# Altium PCB Приставка.PcbDoc
Units mm, origin at the board's own origin, x right, y up, seen from the top; angles counter-clockwise.
Board outline 63 x 34.5 mm, 2 copper layers (Top Layer, Bottom Layer), stack 0.325 mm thick; 36 components, 22 nets, 118 pads, 28 vias.
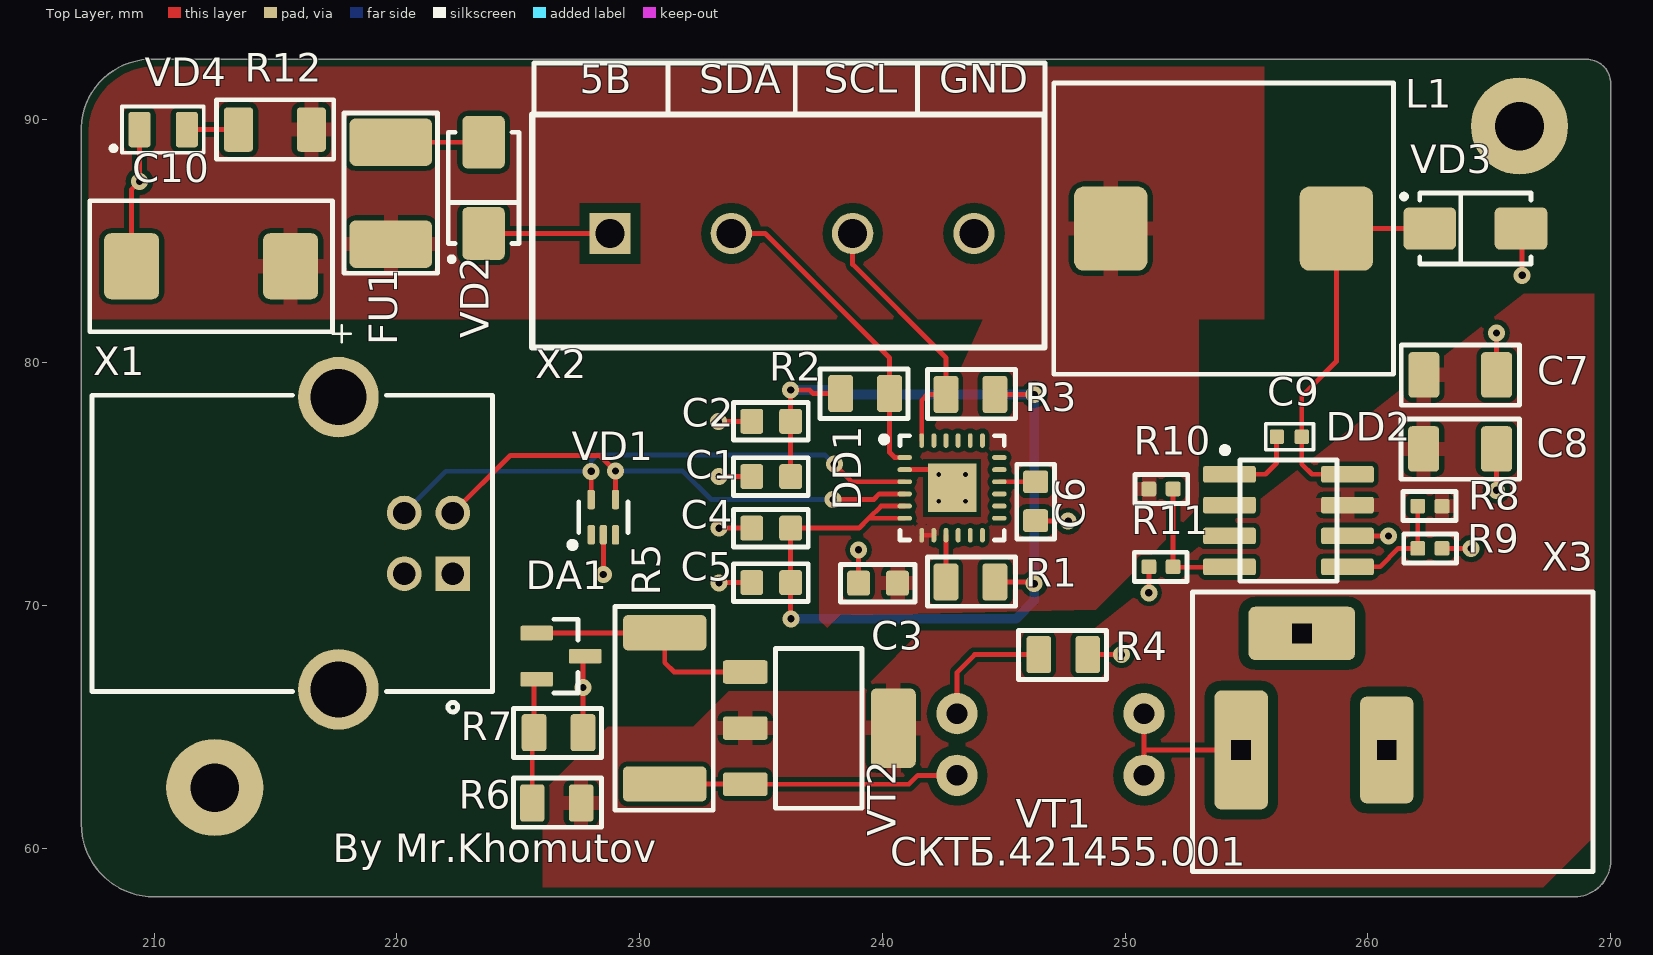
[diagram p0: Top Layer view]
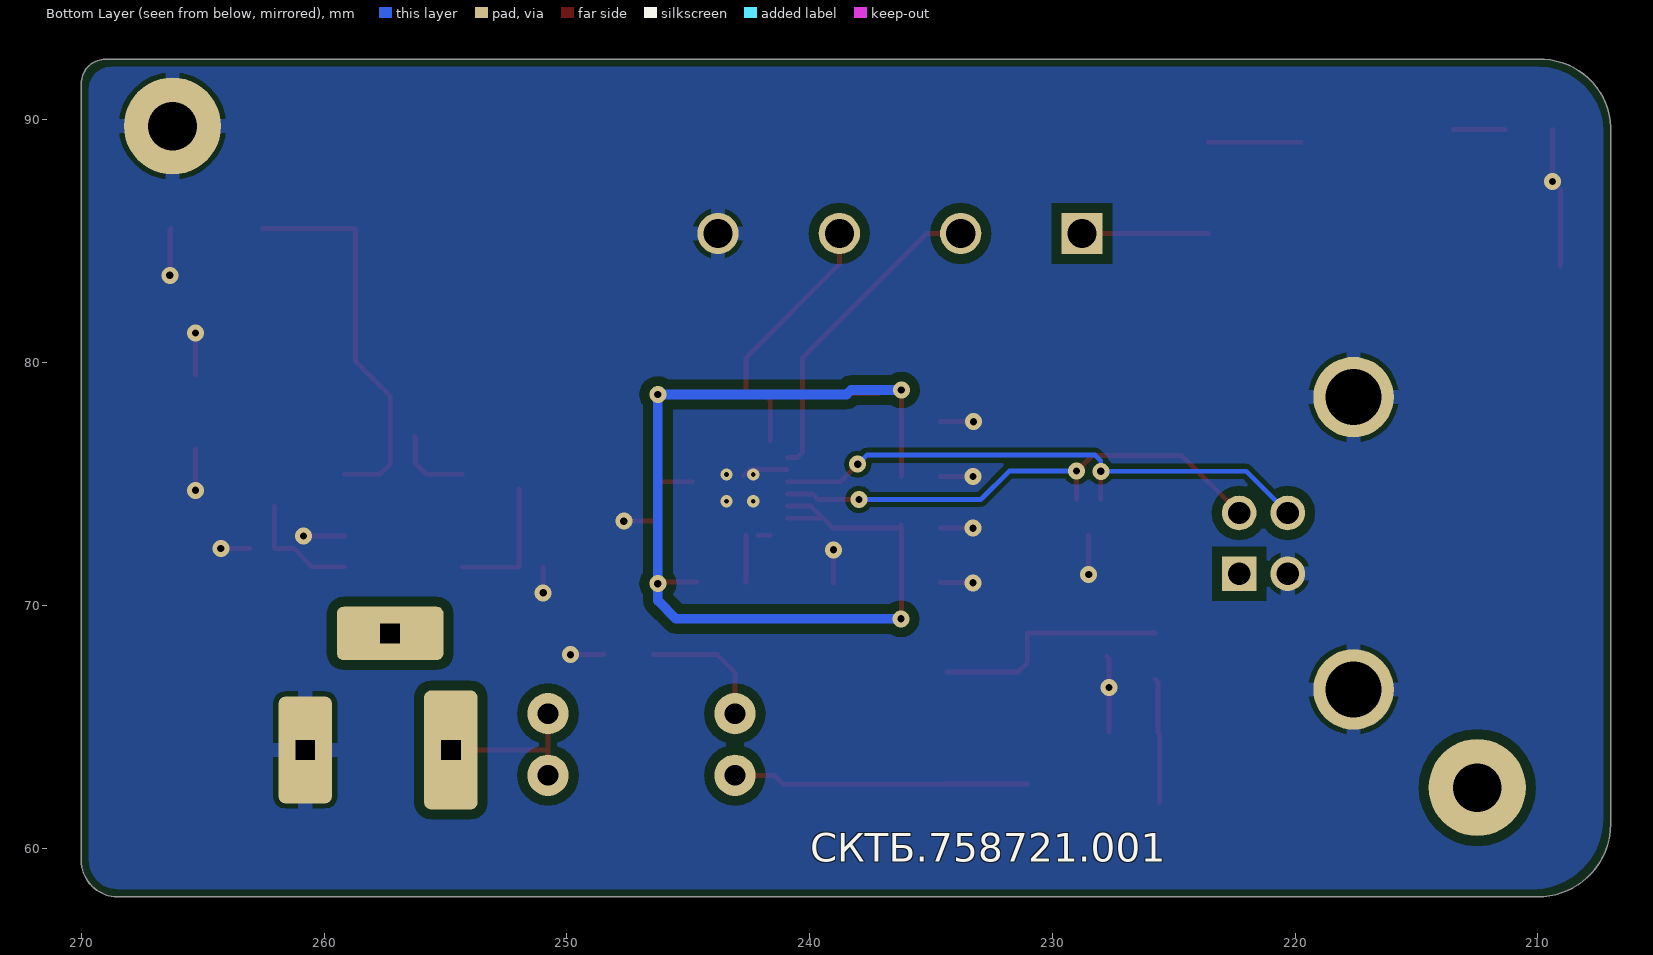
[diagram p1: Bottom Layer view, seen from below]
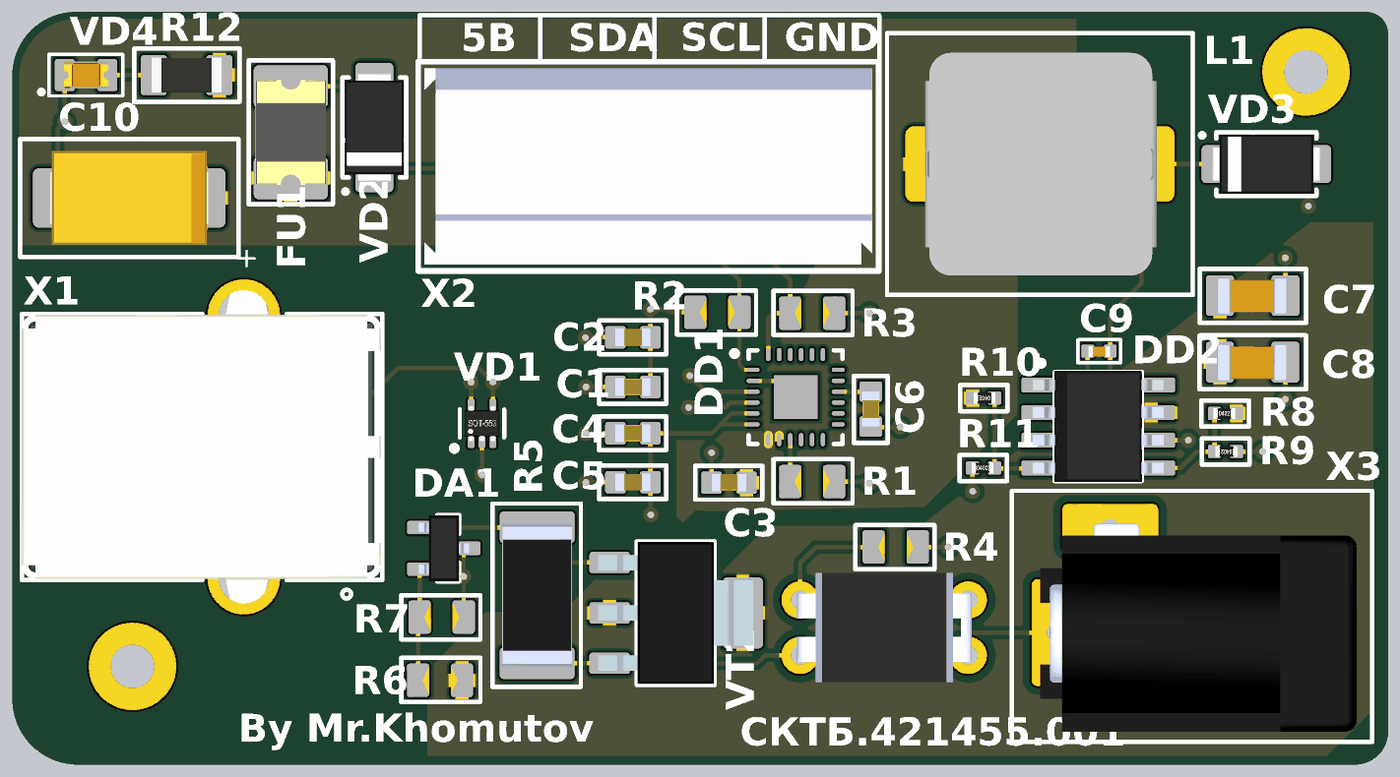
[diagram p2: 3D render of the assembled board from above, using the file's embedded part models]

## Layer stack, top to bottom
Top Solder: solder mask 0.0102, Solder Resist, Dk 3.5
Top Layer: signal copper 0.0356
Dielectric 1: core 0.254, FR-4, Dk 4.2
Bottom Layer: signal copper 0.0356
Bottom Solder: solder mask 0.0102, Solder Resist, Dk 3.5

## Board outline
207,61 207,89.7 cw(c209.9,89.6) 210,92.5 269,92.5 cw(c269,91.5) 270,91.5 270,59.504 cw(c268.498,59.502) 268.5,58 210,58 cw(c210,61)

## Design rules (kind name [scope] priority, off if disabled: settings)
Clearance Clearance_power [InNet('+5В_USB') vs InNet('GND')] p1: gap=0.4 ignorepadtopadclearanceinfootprint=FALSE
Clearance Clearance_power_1 [InNet('X2_VCC') vs InNet('GND')] p2: gap=0.4 ignorepadtopadclearanceinfootprint=FALSE
Clearance Clearance_power_VDD [InNet('NetVD2_1') vs InNet('GND')] p3: gap=0.4 ignorepadtopadclearanceinfootprint=FALSE
Clearance Clearance_power3.3 [InNet('+3,3В') vs InNet('GND')] p4: gap=0.4 ignorepadtopadclearanceinfootprint=FALSE
Clearance [All] p5: gap=0.2 ignorepadtopadclearanceinfootprint=FALSE except(0.1: SMDPad-SMDPad; 0.4: THPad-THPad THPad-Fill THPad-Poly THPad-Region; 0.6: Arc-THPad Track-THPad)
ComponentClearance [All] p1: gap=0.3 collisioncheckmode=3 verticalgap=0.01 showdistances=FALSE
HoleSize [All] p1: absolutevalues=TRUE maxlimit=5 minlimit=0.025 maxpercent=80.000 minpercent=20.000
MinimumSolderMaskSliver [All] p1: minsoldermaskwidth=0.05
PolygonConnect PolygonConnect_via [IsVia] p1: connectstyle=Direct reliefconductorwidth=0.254 reliefentries=4 polygonreliefangle="90 Angle" airgapwidth=0.254
PolygonConnect [All] p2: connectstyle=Relief reliefconductorwidth=0.6 reliefentries=4 polygonreliefangle="90 Angle" airgapwidth=0.2
RoutingVias [All] p1: holewidth=0.3 width=0.7 viastyle="Through Hole" minholewidth=0.3 minwidth=0.7 maxholewidth=0.3 maxwidth=0.7
SilkToSolderMaskClearance [IsPad] p1: minsilkscreentomaskgap=0 clearancetoexposedcopper=TRUE
SolderMaskExpansion [All] p1: expansion=0.102
Width [All] p1: maxlimit=3 minlimit=0.2 preferedwidth=0.2 minimp=50.000000 maximp=50.000000 favimp=50.000000
26 further rules are at their usual default settings.

## Classes and differential pairs
component class "Преобразователь напряжения": C7 C8 C9 C10 DA1 DD2 L1 R4 R5 R6 R7 R8 R9 R10 R11 R12 VD3 VD4 VT1 VT2 X3
component class "Преобразователь интерфейсов": 2 C1 C2 C3 C4 C5 C6 DD1 FU1 R1 R2 R3 VD1 VD2 X1 X2

## Components (designator, comment, footprint, x,y, rotation, side; value= is the part's Value field where it differs from the comment)
C1 "Capacitor" C0603 235.419,75.311 r0 top value=1мк
C2 "Capacitor" C0603 235.419,77.586 r0 top value=0,1мк
C3 "Capacitor" C0603 239.819,70.92 r0 top value=1мк
C4 "Capacitor" C0603 235.419,73.186 r0 top value=1мк
C5 "Capacitor" C0603 235.419,70.945 r0 top value=0,1мк
C6 "Capacitor" C0603 246.31,74.295 r90 top value=1мк
C7 "Capacitor" C1206 263.772,79.476 r180 top value=4,7мк
C8 "Capacitor" C1206 263.767,76.426 r180 top value=4,7мк
C9 "Capacitor" C0402 257.275,76.93 r180 top value=0,01мк
C10 "Capacitor_pol" "TANTAL CASE E" 212.35,83.975 r180 top value=100мк
DA1 "TL431" SOT23-3 226.759,67.914 r0 top
DD1 "CP2112-F02-GM" QFN24 242.869,74.845 r0 top
DD2 "TPS5420" SO8 256.725,73.5 r0 top
FU1 "Fuse" FUSE812 219.75,86.985 r270 top
L1 "Inductor" L4040 254.055,85.525 r180 top value=33мкГн
R1 "Resistor_0,125Вт" R0805 243.626,70.97 r0 top value=10к
R2 "Resistor_0,125Вт" R0805 239.285,78.735 r180 top value=10к
R3 "Resistor_0,125Вт" R0805 243.626,78.695 r0 top value=10к
R4 "Resistor_0,125Вт" R0805 247.45,67.975 r180 top value=10к
R5 "Resistor_1Вт" R2512 231.034,65.764 r90 top value=620
R6 "Resistor_0,125Вт" R0805 226.584,61.864 r0 top value=8,2к
R7 "Resistor_0,125Вт" R0805 226.659,64.764 r180 top value=1,5к
R8 "Resistor_0,062Вт" R0402 262.55,74.095 r0 top value=10к
R9 "Resistor_0,062Вт" R0402 262.55,72.35 r180 top value=560
R10 "Resistor_0,062Вт" R0402 251.475,74.8 r180 top value=10к
R11 "Resistor_0,062Вт" R0402 251.475,71.595 r0 top value=3,3к
R12 "Resistor_0,25Вт" R1206 214.977,89.605 r0 top value=180
VD1 "SP3003-02XTG" SOT553 228.505,73.638 r90 top
VD2 "DiodeSchottky" SMA 223.575,87.205 r90 top
VD3 "DiodeSchottky" SMA 264.425,85.525 r0 top
VD4 "LED" L_0805 210.375,89.605 r0 top
VT1 "P-MOSFET" HD-1 246.925,64.275 r180 top
VT2 "BJT NPN" SOT-223 237.375,64.95 r270 top
X1 "Вход USB Type B" "USB-B RECEPTACLE" 207.785,72.563 r270 top
X2 "I2C устройства" "TERMINAL 4 way-5mm" 236.275,85.325 r0 top
X3 "Вход питания 12В" DS-210 254.775,64.05 r180 top

## Footprints (in the part's own frame and the unit in brackets; to place one, negate y for a bottom-side part, rotate by r counter-clockwise, add the part's x,y. Pads: shape width x height; smd on the part's side, far side on the other; paste and mask are expansions set on the pad)
C0402 [mm]
  rrect25% 0.59x0.6 smd: 1(0,-0.02) 2(1.025,-0.02)
  silkscreen extent -0.48,-0.55 1.48,0.51, body extent 0.01,-0.25 1.01,0.25, height 0.48
C0603 [mm]
  rrect25% 0.94x1.03 smd: 1(-0.8,0) 2(0.8,0)
  silkscreen extent -1.55,-0.77 1.53,0.77, body extent -0.8,-0.4 0.8,0.4, height 0.9
C1206 [mm]
  rrect25% 1.28x1.87 smd: 1(-1.528,-0.024) 2(1.472,-0.024)
  silkscreen extent -2.47,-1.25 2.4,1.22, body extent -1.6,-0.85 1.6,0.85, height 1.75
DS-210 [mm] "Гнездо питания 2,1х5,5мм на панель"
  rrect25% 2.2x4.9 hole 0.8 square: 1(0,0)
  rrect25% 2.2x4.4 hole 0.8 square: 2(-6,0)
  rrect25% 4.4x2.2 hole 0.8 square: 3(-2.5,-4.8)
  silkscreen extent -14.5,-6.5 2,5, body extent -13.79,-5 0.71,4.55, height 11.5
FUSE812 [mm] "Самовосстанавливающийся предохранитель"
  rrect25% 1.95x3.4 smd: 1(-2.1,0) 2(2.1,0)
  silkscreen extent -3.3,-1.92 3.3,1.92, body extent -2.41,-1.61 2.41,1.61, height 1.32
HD-1 [mm]
  round 1.7 hole 0.85: 1(3.85,-1.27) 2(3.85,1.27) 3(-3.85,-1.27) 3(-3.85,1.27)
  body extent -4.01,-2.5 4.01,2.5, height 6.7
L4040 [mm]
  rrect25% 3.02x3.46 smd paste-5: 1(-4.645,0) 2(4.65,0)
  silkscreen extent -7,-6 7,6, body extent -5.35,-5.11 5.27,5.11, height 3.78
L_0805 [mm] "SMD LED LAMP"
  rrect25% 0.91x1.46 smd: 1(-0.975,0) 2(0.975,0)
  silkscreen extent -2.15,-0.95 1.68,0.95, body extent -1.01,-0.62 1.01,0.63, height 1.1
QFN24 [mm]
  oval 0.6x0.2 smd: 1(-1.95,1.25) 2(-1.95,0.75) 3(-1.95,0.25) 4(-1.95,-0.25) 5(-1.95,-0.75) 6(-1.95,-1.25) 13(1.95,-1.25) 14(1.95,-0.75) 15(1.95,-0.25) 16(1.95,0.25) 17(1.95,0.75) 18(1.95,1.25)
  oval 0.2x0.6 smd: 7(-1.25,-1.95) 8(-0.75,-1.95) 9(-0.25,-1.95) 10(0.25,-1.95) 11(0.75,-1.95) 12(1.25,-1.95) 19(1.25,1.95) 20(0.75,1.95) 21(0.25,1.95) 22(-0.25,1.95) 23(-0.75,1.95) 24(-1.25,1.95)
  rect 2x2 smd: 25(0,0)
  silkscreen extent -2.92,-2.15 2.15,2.15, body extent -2,-2 2,2, height 0.8
R0402 [mm]
  rrect25% 0.61x0.6 smd: 1(-0.5,0) 2(0.5,0)
  silkscreen extent -1.1,-0.6 1.07,0.6, body extent -0.55,-0.25 0.45,0.25, height 0.35
R0805 [mm] "Chip Resistor, 2-Leads, Body 2,10x1,30mm, IPC Medium Density"
  rrect25% 1.02x1.53 smd paste-5: 1(-1.008,0) 2(1.008,0)
  silkscreen extent -1.78,-1 1.85,1.02, body extent -1.1,-0.7 1.1,0.7, height 0.55
R1206 [mm]
  rrect25% 1.2x1.83 smd: 1(-1.5,0) 2(1.5,0)
  silkscreen extent -2.4,-1.22 2.42,1.22, body extent -1.6,-0.8 1.6,0.8, height 0.55
R2512 [mm]
  rrect25% 1.45x3.43 smd: 1(-3.115,0) 2(3.115,0)
  silkscreen extent -4.2,-2 4.2,2.05, body extent -3.35,-1.6 3.35,1.6, height 0.55
SMA [mm]
  rrect25% 2.17x1.74 smd: 1(-1.88,0) 2(1.88,0)
  silkscreen extent -3.04,-1.46 2.29,1.46, body extent -2.5,-1.35 2.5,1.35, height 2.15
SO8 [mm]
  rrect25% 2.17x0.68 smd: 1(-2.43,1.905) 2(-2.43,0.635) 3(-2.43,-0.635) 4(-2.43,-1.905) 5(2.43,-1.905) 6(2.43,-0.635) 7(2.43,0.635) 8(2.43,1.905)
  silkscreen extent -2.74,-2.5 2,3.02, body extent -3,-2.54 3,2.54, height 1.7
SOT23-3 [mm]
  rrect25% 1.35x0.61 smd: 1(-1,0.95) 2(-1,-0.95) 3(1,0)
  silkscreen extent -0.3,-1.52 0.7,1.52, body extent -1.15,-1.5 1.15,1.5, height 1.1
SOT553 [mm]
  rrect50% 0.8x0.305 smd: 1(-0.725,0.5) 2(-0.725,0) 3(-0.725,-0.5) 4(0.725,-0.5) 5(0.725,0.5)
  silkscreen extent -1.27,-1.02 0.64,1.39, body extent -0.8,-0.8 0.8,0.8, height 0.48
SOT-223 [mm]
  rrect25% 0.97x1.85 smd: 1(-2.311,-3.024) 2(0,-3.024) 3(2.311,-3.024)
  rrect25% 3.27x1.85 smd: 2(0,3.074)
  silkscreen extent -3.28,-1.78 3.3,1.78, body extent -3.25,-3.54 3.25,3.54, height 1.65
"TANTAL CASE E" [mm]
  rrect25% 2.27x2.72 smd: 1(-3.275,0) 2(3.275,0)
  silkscreen extent -5.75,-2.7 5,3.12, body extent -3.65,-2.15 3.65,2.15, height 4.5
"TERMINAL 4 way-5mm" [mm]
  rect 1.7x1.7 hole 1.2: 1(-7.5,0)
  round 1.7 hole 1.2: 2(-2.5,0) 3(2.5,0) 4(7.5,0)
  silkscreen extent -10.7,-4.7 10.4,4.9, body extent -10.4,-4.4 10.1,4.6, height 15.2
"USB-B RECEPTACLE" [mm]
  rect 1.428x1.428 hole 0.92: 1(1.25,14.52)
  round 1.428 hole 0.92: 2(-1.25,14.52) 3(-1.25,12.52) 4(1.25,12.52)
  round 3.316 hole 2.3: 4(-6.02,9.81) 4(6.02,9.81)
  silkscreen extent -6.1,-0.35 6.95,16.15, body extent -7.5,-0.35 7.5,16.1, height 10.3

## Part data
C1 C3 C4 C6: library part cap134, "Конденсатор", Part Name=Capacitors, Part Number=GRM188R71C105KA12D**, Voltage=50B, id=cap134, TKE=X7R
C2 C5: library part cap131, "Конденсатор", Part Name=Capacitors, Part Number=GRM188R71H104K, Voltage=50B, id=cap131, TKE=X7R
C7 C8: library part cap189, "Конденсатор", Manufacture=Murata, Part Name=Ceramic, Part Number=GRM31CR71H475KA12L, Voltage=50В, id=cap189, TKE=X7R
C9: library part cap42, "Конденсатор", Manufacture=Murata, Part Name=Ceramic, Part Number=GRM155R71H103K, Voltage=50B, id=cap42, TKE=X7R
C10: library part cap197, "Конденсатор полярный", Manufacture=Murata, Part Name=Polimer, Part Number=ECASD91B107M012K00, Voltage=12,5В, id=cap197, TKE=12mOhm
DA1: library part TL431ACDBZR, "Программируемый стабилитрон", Part Name="Precision Programmable Reference", Voltage min stabilize=2,5B, Working current=100mA, Accuracy=0.01, id=ref1, Part Number=TL431ACDBZR
DD1: library part interf14, "USB-I2C преобразователь", Current Consumption=15mA, Manufacture="Silicon Laboratories", Part Name="HID USB to SMBUS Bridge", Power Supply=3.0-3.6V, id=interf14, Part Number=CP2112-F02-GM, Type Supply="Single Polar", Vref output=3.45V
DD2: library part pwr13, "2-A, WIDE INPUT RANGE, STEP-DOWN CONVERTER", Current=2A, Input Voltage="5,5 - 36B", Manufacturer="Texas Instruments", Output Voltage=Adj, Part Name="Step-Down Converter", id=pwr13, Part Number=TPS5420, Type=Impulse
FU1: library part fuse20, "Предохранитель", Manufacture=Bourns, Part Name="Resettable Fuses", Part Number=MF-USMF005-2, Resistance=2,8Ohms, id=fuse20, I hold=0,05A, I max=10A, I trip=0,15A, V max=30B
L1: library part ind8, "EMI Suppression Filter", Manufacture=Vishay, Part Number=IHLP4040DZER330M11, Rated Current=4A, Resistance=94,5mOhm, id=ind8, Part Name=Inductor
R1 R2 R3: library part res97, "Резистор", Manufacture=Yageo, Part Name=Resistor, Part Number=RC0805FR-0710KL, Power=0,125Вт, Accuracy=1%, id=res97
R4: library part res121, "Резистор", Manufacture=Yageo, Part Name=Resistor, Part Number=RC0805FR-07100KL, Power=0,125Вт, Accuracy=1%, id=res121
R5: library part res840, "Резистор", Manufacture=Yageo, Part Name=Resistor, Part Number=RC2512FR-07620RL, Power=1Вт, Accuracy=1%, id=res840
R6: library part res95, "Резистор", Manufacture=Yageo, Part Name=Resistor, Part Number=RC0805FR-078K2, Power=0,125Вт, Accuracy=1%, id=res95
R7: library part res77, "Резистор", Manufacture=Yageo, Part Name=Resistor, Part Number=RC0805FR-071K5, Power=0,125Вт, Accuracy=1%, id=res77
R8 R10: library part res290, "Резистор", Manufacture=Yageo, Part Name=Resistor, Part Number=RC0402FR-0710KL, Power=0,062Вт, Accuracy=1%, id=res290
R9: library part res260, "Резистор", Manufacture=Yageo, Part Name=Resistor, Part Number=RC0402FR-07560RL, Power=0,062Вт, Accuracy=1%, id=res260
R11: library part res278, "Резистор", Manufacture=Yageo, Part Name=Resistor, Part Number=RC0402FR-072K3, Power=0,062Вт, Accuracy=1%, id=res278
R12: library part res634, "Резистор", Manufacture=Yageo, Part Name=Resistor, Part Number=RC1206FR-07180RL, Power=0,25Вт, Accuracy=1%, id=res634
VD1: library part diode14, "Двухканальная ESD защита USB", Breakdown Voltage=6В, Capacitance=0,65pF, Leakage current=0,5uA, Manufacture=Littelfuse, Part Name="ESD Suppression Diodes for USB", id=diode14, Number of Channels=2, Part Number=SP3003-02XTG, Reverse Voltage=6В
VD2: library part diode2, "Диод Шоттки", Forward Current=3A, Forward Voltage=0,55B, Manufacture="Taiwan Semiconductor", Part Name="Diode Schottky", Part Number=SK34A, Reverse Voltage=40B, id=diode2
VD3: library part diode2, "Диод Шоттки", Forward Current=3A, Forward Voltage=0,55B, Manufacture="Taiwan Semiconductor", Max Reverse Voltage=40B, Part Name="Diode Schottky", Part Number=SK34A, id=diode2
VD4: library part diode8, "Светодиод", Part Number=KP-2012EC, id=diode8, Part Name=LED
VT1: library part trans1, "N-MOSFET", Continuous drain current=2,5A, Gate-to-source voltage=(+-)20B, Manufacturer=Vishay, Part Name=Transistor, Part Number=IRFD9024PBF, Power dissipation=1,3W, Pulsed drain current=20A, id=trans1, Rds=0,28Ohm, Structure=p-channel, V drain-source max=(-60B)
VT2: library part bjt3, Frequency=130МГц, Part Name=Transistor, Part Number=PBSS4540Z.115, Power=2Вт, hfe=300, Ic max=5А, id=bjt3, Structure=npn, Vceo max=40В
X1: library part connect39, "Разъем - 4 конт. розетка", Manufacture=CUI, Part Name="USB Type B 2.0 Receptacle", Part Number=UJ2-BH-W2-TH, Contact_1=+5В, Contact_2=D-, Contact_3=D+, Contact_4=GND, id=connect39
X2: library part connect24, "Разъем - 4 конт. клеммник", Part Name="TERMINAL BLOCK 4 way", Contact_1=+5В, Contact_2=SDA, Contact_3=SCL, Contact_4=GND, Etch=5mm, id=connect24
X3: library part connect1, "Разъем - 2 конт. розетка", Part Name="DC Power Jack", Part Number=DS-210B(PBT)(NB), Contact_1=+12В, Contact_2=GND, id=connect1

## Free pads (board coordinates)
  round 4 hole 2: 2(212.5,62.5) 2(266.242,89.75)

## Via types
v1: diameter 0.7, hole 0.3, Top Layer to Bottom Layer, tented both sides, 24 vias
v2: diameter 0.5, hole 0.2, Top Layer to Bottom Layer, 4 vias

## Nets (pads, with @x,y where several pads share a name; then routed paths per layer and width w, separated by ;. In a path a pad name is that pad's centre, name@x,y a point inside that pad or via, vN(x,y) a via of type N, cw(c..) or ccw(c..) an arc to the next point about the centre after c; other vN are vias at no path point)
+3,3В: C1.2 C2.2 C4.2 C5.2 DD1.5 DD1.6 R1.2 R2.2 R3.2 | length 48.4
  Top Layer w0.2: C4.2@236.219,73.326 C4.2@236.359,73.186 ; C1.2 C2.2 v1(236.219,78.875) 237,78.875 237.14,78.735 R2.2 ; v1(236.238,69.45) 236.219,69.469 C5.2 C4.2 C4.2@236.359,73.186 ; DD1.6 239.444,73.595 ; DD1.5 239.944,74.095 239.444,73.595 ; R1.2 245.974,70.97 246.119,70.825 246.194,70.9 v1(246.25,70.9) ; R3.2 v1(246.25,78.695) ; C4.2@236.359,73.186 239.036,73.186 239.444,73.595
  Bottom Layer w0.4: v1(236.219,78.875) 238.29,78.875 238.47,78.695 v1(246.25,78.695) v1(246.25,70.9) 246.25,70.2 245.5,69.45 v1(236.238,69.45)
+5В: C3.2 C10.1 DD1.7 DD1.8 FU1.2 L1.2 R10.2 R12.2 | length 0.5
  Top Layer w0.2: DD1.7 DD1.8
+12В: C7.2 C8.2 DD2.7 R6.2 R8.2 VT2.2
DD1_1_SDA: DD1.1 R2.1 X2.2 | length 13.3
  Top Layer w0.2: X2.2 235.175,85.325 240.293,80.207 R2.1 240.293,76.307 240.505,76.095 DD1.1
DD1_3_D+: DD1.3 VD1.5 X1.3 | length 23.5
  Top Layer w0.2: VD1.5 v1(228.005,75.528) ; v1(238.019,75.82) 238.744,75.095 DD1.3
  Bottom Layer w0.2: X1.3 222.02,75.528 v1(228.005,75.528) 228.005,75.961 228.239,76.195 237.643,76.195 v1(238.019,75.82)
DD1_4_D-: DD1.4 VD1.4 X1.2 | length 21.6
  Top Layer w0.2: X1.2 224.67,76.178 228.365,76.178 v1(229.005,75.538) VD1.4 ; v1(237.969,74.365) 239.647,74.365 239.876,74.595 DD1.4
  Bottom Layer w0.2: v1(229.005,75.538) 231.777,75.538 232.95,74.365 v1(237.969,74.365)
DD1_9_R\S\T\: DD1.9 R1.1 | length 1.9
  Top Layer w0.2: R1.1 DD1.9
DD1_16_VPP: C6.2 DD1.16 | length 1.5
  Top Layer w0.2: DD1.16 C6.2
DD1_24_SCL: DD1.24 R3.1 X2.3 | length 11
  Top Layer w0.2: X2.3 238.775,84.05 242.619,80.206 R3.1 241.853,78.695 241.619,78.461 DD1.24
GND: C1.1 C2.1 C3.1 C4.1 C5.1 C6.1 C7.1 C8.1 C10.2 DA1.3 DD1.2 DD1.25 DD2.6 pad.2@266.242,89.75 R4.1 R7.1 R9.1 R11.1 VD1.2 VD3.2 VD4.1 X1.4 X2.4 X3.2 | length 31.4
  Top Layer w0.2: C10.2 209.075,87.141 v1(209.4,87.466) VD4.1 ; R7.1 v1(227.667,66.625) 227.667,67.821 DA1.3 ; v1(228.505,71.278) VD1.2 ; v1(233.244,77.571) 233.259,77.586 C2.1 ; v1@233.262,73.235 233.311,73.186 C4.1 ; v1(233.267,70.936) 233.275,70.945 C5.1 ; v1(233.269,75.311) C1.1 ; C3.1 v1(239.019,72.295) ; DD1.2 242.474,75.595 DD1.25@242.719,75.351 ; C6.1 246.33,73.475 v1(247.65,73.475) ; R4.1 v1(249.85,67.975) ; v1(250.975,70.525) R11.1 ; DD2.6 v1(260.85,72.865) v1@260.865,72.85 ; R9.1 v1(264.25,72.35) ; v1(265.295,74.746) C8.1 C8.1@265.3,76.455 ; v1(265.295,81.225) 265.3,81.22 C7.1 ; VD3.2 266.35,85.48 v1(266.35,83.6)
  other v1: 233.267,73.186
  other v2: 242.319,74.295 243.419,74.295 242.319,75.395 243.419,75.395
NetC9_1: C9.1 DD2.8 L1.1 VD3.1 | length 16.2
  Top Layer w0.2: DD2.8 257.695,75.405 257.275,75.825 C9.1 257.275,78.625 258.7,80.05 L1.1 VD3.1
NetC9_2: C9.2 DD2.1 | length 3.3
  Top Layer w0.2: DD2.1 255.78,75.405 256.234,75.859 C9.2@256.234,76.934 ; C9.2 C9.2@256.234,76.934 ; C9.2@256.269,76.934 C9.2@256.234,76.934
NetDA1_1: DA1.1 R5.2 VT2.1 | length 10
  Top Layer w0.2: DA1.1 231.019,68.864 R5.2 231.034,67.645 231.418,67.261 VT2.1
NetDA1_2: DA1.2 R6.1 R7.2 | length 5.2
  Top Layer w0.2: R6.1 225.577,64.689 R7.2 225.652,66.856 DA1.2
NetDD2_4: DD2.4 R10.1 R11.2 | length 5.5
  Top Layer w0.2: R11.2@251.975,71.575 254.275,71.575 DD2.4 ; R11.2 R10.1
NetDD2_5: DD2.5 R8.1 R9.2 | length 5
  Top Layer w0.2: DD2.5 260.499,71.595 261.254,72.35 R9.2 R8.1
NetFU1_1: FU1.1 VD2.2 | length 3.8
  Top Layer w0.2: FU1.1 VD2.2
NetR4_2: R4.2 VT1.1 | length 5.4
  Top Layer w0.2: VT1.1 243.075,67.25 243.8,67.975 R4.2
NetR5_1: R5.1 VT1.2 VT2.3 | length 12.2
  Top Layer w0.2: R5.1 234.341,62.649 VT2.3 241.089,62.639 241.455,63.005 VT1.2
NetR12_1: R12.1 VD4.2 | length 2.1
  Top Layer w0.2: VD4.2 R12.1
NetVT1_3: VT1.3 X3.1 | length 6.6
  Top Layer w0.2: VT1.3@250.775,63.005 250.775,64.1 ; VT1.3@250.775,65.545 250.775,64.1 ; X3.1 250.825,64.05 250.775,64.1
X2_VCC: VD2.1 X2.1 | length 5.2
  Top Layer w0.2: VD2.1 X2.1
pads on no net: DD1.10 DD1.11 DD1.12 DD1.13 DD1.14 DD1.15 DD1.17 DD1.18 DD1.19 DD1.20 DD1.21 DD1.22 DD1.23 DD2.2 DD2.3 VD1.1 VD1.3 X1.1 X3.3

## Polygon pours and split planes (outlines as drawn)
+5В on Top Layer "+5В" (solid, remove dead copper, pour order 14): 240.832,73.303 237.401,73.303 237.401,69.399 237.725,69.075 238.3,69.65 241.375,69.65
+5В on Top Layer "+5В" (solid, remove dead copper, pour order 12): 244.178,81.85 238.597,69.594 248.783,69.817 253.027,74.06 253.027,81.85
+5В on Top Layer "+5В" (solid, remove dead copper, pour order 10): 207.05,93.525 224.115,93.525 255.725,93.6 255.725,81.8 207.05,81.8
+12В on Top Layer "+12В" (solid, remove dead copper, pour order 8): 266.42,82.85 269.325,82.85 269.325,60.504 267.221,58.4 226,58.4 226,62.325 228.689,65.014 232.214,65.014 233.663,66.463 239.113,66.463 241.6,68.95 248.594,68.95
GND on Bottom Layer "GND" (solid, remove dead copper, pour order 6): 201.942,101.858 276.087,101.858 276.087,49.225 201.942,49.225

## Silkscreen, mask and mechanical layers (free items; w line width, h text height)
Top Overlay:
  lines w0.2: 225.6,90.275 225.65,90.325 225.65,92.35 246.7,92.35 246.7,90.275 ; 231.175,90.265 231.175,92.325 ; 236.409,90.265 236.409,92.331 ; 241.45,90.325 241.45,92.325
  text "SCL" at 237.582,90.72 h2
  text "GND" at 242.35,90.72 h2
  text "5В" at 227.525,90.7 h2
  text "SDA" at 232.455,90.7 h2
  text "By Mr.Khomutov" at 217.35,59.043 h2
  text "СКТБ.421455.001" at 240.319,58.882 h2
Bottom Overlay:
  text "СКТБ.758721.001" at 239.967,59.05 h2
Mechanical 1:
  the board outline again, w0.2